# EAGLE board daughterboard (EAGLE 6.6.0)
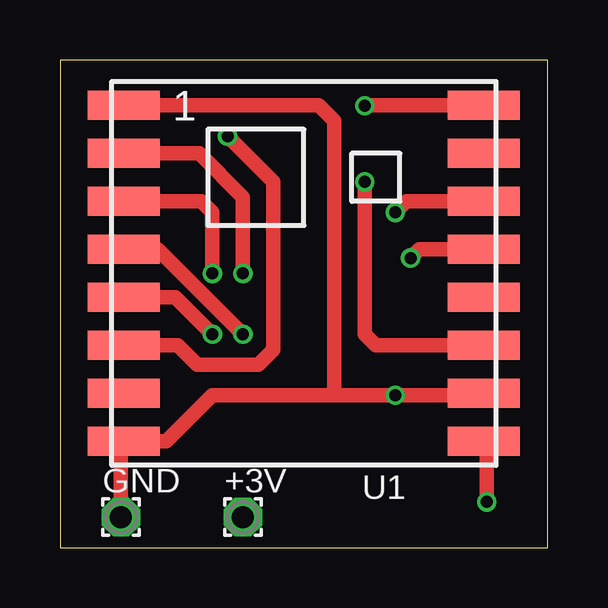
[diagram p0: board, top side]
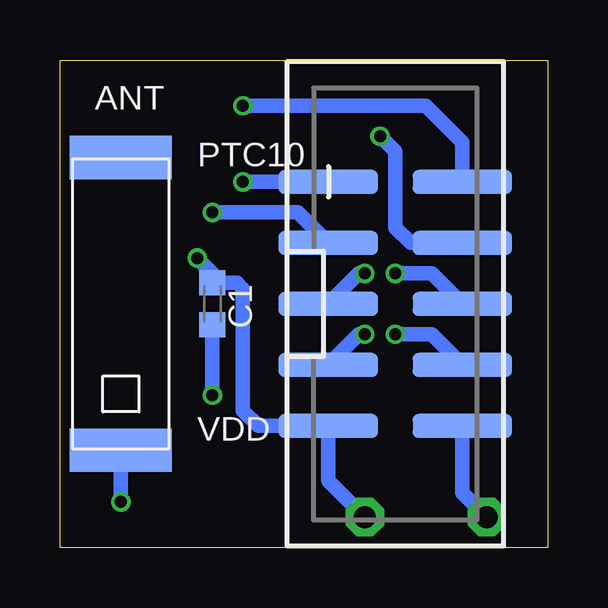
[diagram p1: board, bottom side, seen from below]

Size 20.32 x 20.32 mm. Coordinates in mm from the lower left corner, seen from the top.
Outline: 0,0 20.32,0 20.32,20.32 0,20.32 0,0
Copper layers (1*16): Top 0.035mm / dielectric 1.5mm / Bottom 0.035mm
Design rules "dirt_cheap_dirty_boards.v1 *": minimum track width 6mil, minimum drill 13mil, track to track 6mil, track to pad 6mil, pad to pad 6mil, via to via 6mil, smd to smd 0mil, copper to edge 10mil, drill to drill 10mil, minimum pad ring 10mil, minimum via ring 6mil, stop-mask expansion 2mil, vias tented up to drill 25mil, thermal gap 10mil

## Footprints (pad centres in the part's own frame; a part is rotated, then mirrored left to right if it is on the bottom)
1,6/0,9 = drill 0.914 pad 1.6 octagon: 1 0,0
ANT1204 = smd 1.8 x 4.25: FEED -6.1,0; NC 6.1,0
C0603K = smd 1.05 x 1.08: 1 -0.875,0; 2 0.875,0
2X5-SHROUDED_SMD = smd 4.15 x 1: 1 -2.794,5.08; 2 2.794,5.08; 3 -2.794,2.54; 4 2.794,2.54; 5 -2.794,0; 6 2.794,0; 7 -2.794,-2.54; 8 2.794,-2.54; 9 -2.794,-5.08; 10 2.794,-5.08
RFM69HCW-XXXS2 = smd 3 x 1.2: 1 -7.5,7; 2 -7.5,5; 3 -7.5,3; 4 -7.5,1; 5 -7.5,-1; 6 -7.5,-3; 7 -7.5,-5; 8 -7.5,-7; 9 7.5,-7; 10 7.5,-5; 11 7.5,-3; 12 7.5,-1; 13 7.5,1; 14 7.5,3; 15 7.5,5; 16 7.5,7

## Placement (x,y rotation side)
+3V  [1,6/0,9]  7.62,1.27 0 top
ANT  ANT1204  [ANT1204]  17.78,10.16 90 bottom
C1  0.1 uF  [C0603K]  13.97,10.16 270 bottom
GND  [1,6/0,9]  2.54,1.27 0 top
J1  [2X5-SHROUDED_SMD]  6.35,10.16 0 bottom
U1  RFM69HCW  [RFM69HCW-XXXS2]  10.16,11.43 0 top

## Library data of the parts
+3V GND = wirepad
ANT = RF
C1 = rcl
J1 = SparkFun-Connectors
U1 = SparkFun-RF; PROD_ID: IC-11997, IC-12053

## Nets
GND: C1.2 GND.1 J1.10 U1.1 U1.8 U1.10
MISO: J1.5 U1.2
MOSI: J1.6 U1.3
N$1: ANT.FEED U1.9
PTC8: J1.4 U1.6
PTC9: J1.3 U1.14
PTC10: J1.2 U1.16
PTC11: J1.1 U1.11
SCK: J1.7 U1.4
SS: J1.8 U1.5
VCC: +3V.1 C1.1 J1.9 U1.13

## Tracks (layer width: path | path; a pad name or v marks a point on that pad's centre or on a via)
GND  (via drill 0.5)
  Top 0.61: GND.1 2.54,4.31 U1.8 4.43,4.43 6.35,6.35 11.43,6.35 | U1.10 17.58,6.35 v13.97,6.35 11.43,6.35 | U1.1 10.78,18.43 11.43,17.78 11.43,6.35
  Bottom 0.61: GND.1 3.56,2.29 J1.10 | C1.2 v13.97,6.35
MISO  (via drill 0.5)
  Top 0.61: v7.62,11.43 7.62,14.61 5.79,16.43 U1.2
  Bottom 0.61: J1.5 7.87,11.43 v7.62,11.43
MOSI  (via drill 0.5)
  Top 0.61: U1.3 5.89,14.43 6.35,13.97 v6.35,11.43
  Bottom 0.61: J1.6 4.83,11.43 v6.35,11.43
N$1  (via drill 0.5)
  Top 0.61: U1.9 17.78,4.31 v17.78,1.91
  Bottom 0.61: v17.78,1.91 ANT.FEED
PTC8  (via drill 0.5)
  Top 0.61: v6.99,17.14 8.89,15.24 8.89,8.26 8.26,7.62 5.71,7.62 4.91,8.43 U1.6
  Bottom 0.61: J1.4 5.71,12.7 6.35,13.34 6.35,16.51 v6.99,17.14
PTC9  (via drill 0.5)
  Top 0.61: U1.14 14.43,14.43 v13.97,13.97
  Bottom 0.61: v13.97,13.97 10.41,13.97 J1.3
PTC10  (via drill 0.5)
  Top 0.61: v12.7,18.41 12.71,18.43 U1.16
  Bottom 0.61: J1.2 3.56,16.89 5.08,18.41 v12.7,18.41
PTC11  (via drill 0.5)
  Top 0.61: U1.11 13.16,8.43 12.7,8.89 v12.7,15.24
  Bottom 0.61: v12.7,15.24 J1.1
SCK  (via drill 0.5)
  Top 0.61: v7.62,8.89 4.08,12.43 U1.4
  Bottom 0.61: J1.7 7.87,8.89 v7.62,8.89
SS  (via drill 0.5)
  Top 0.61: v6.35,8.89 4.81,10.43 U1.5
  Bottom 0.61: J1.8 4.83,8.89 v6.35,8.89
VCC  (via drill 0.5)
  Top 0.61: v14.61,12.06 14.97,12.43 U1.13
  Bottom 0.61: +3V.1 9.14,2.79 J1.9 12.06,5.08 12.7,5.71 12.7,10.79 12.94,11.04 C1.1 13.97,11.43 v14.61,12.06

## Text on the board
bPlace: PTC10 | VDD